# Altium PCB Board.PcbDoc (part 2 of 4)
Units mm, origin at the board's own origin, x right, y up, seen from the top; angles counter-clockwise.
Board outline 88 x 92.5 mm, 2 copper layers (Top Layer, Bottom Layer); 85 components, 67 nets, 346 pads, 106 vias.
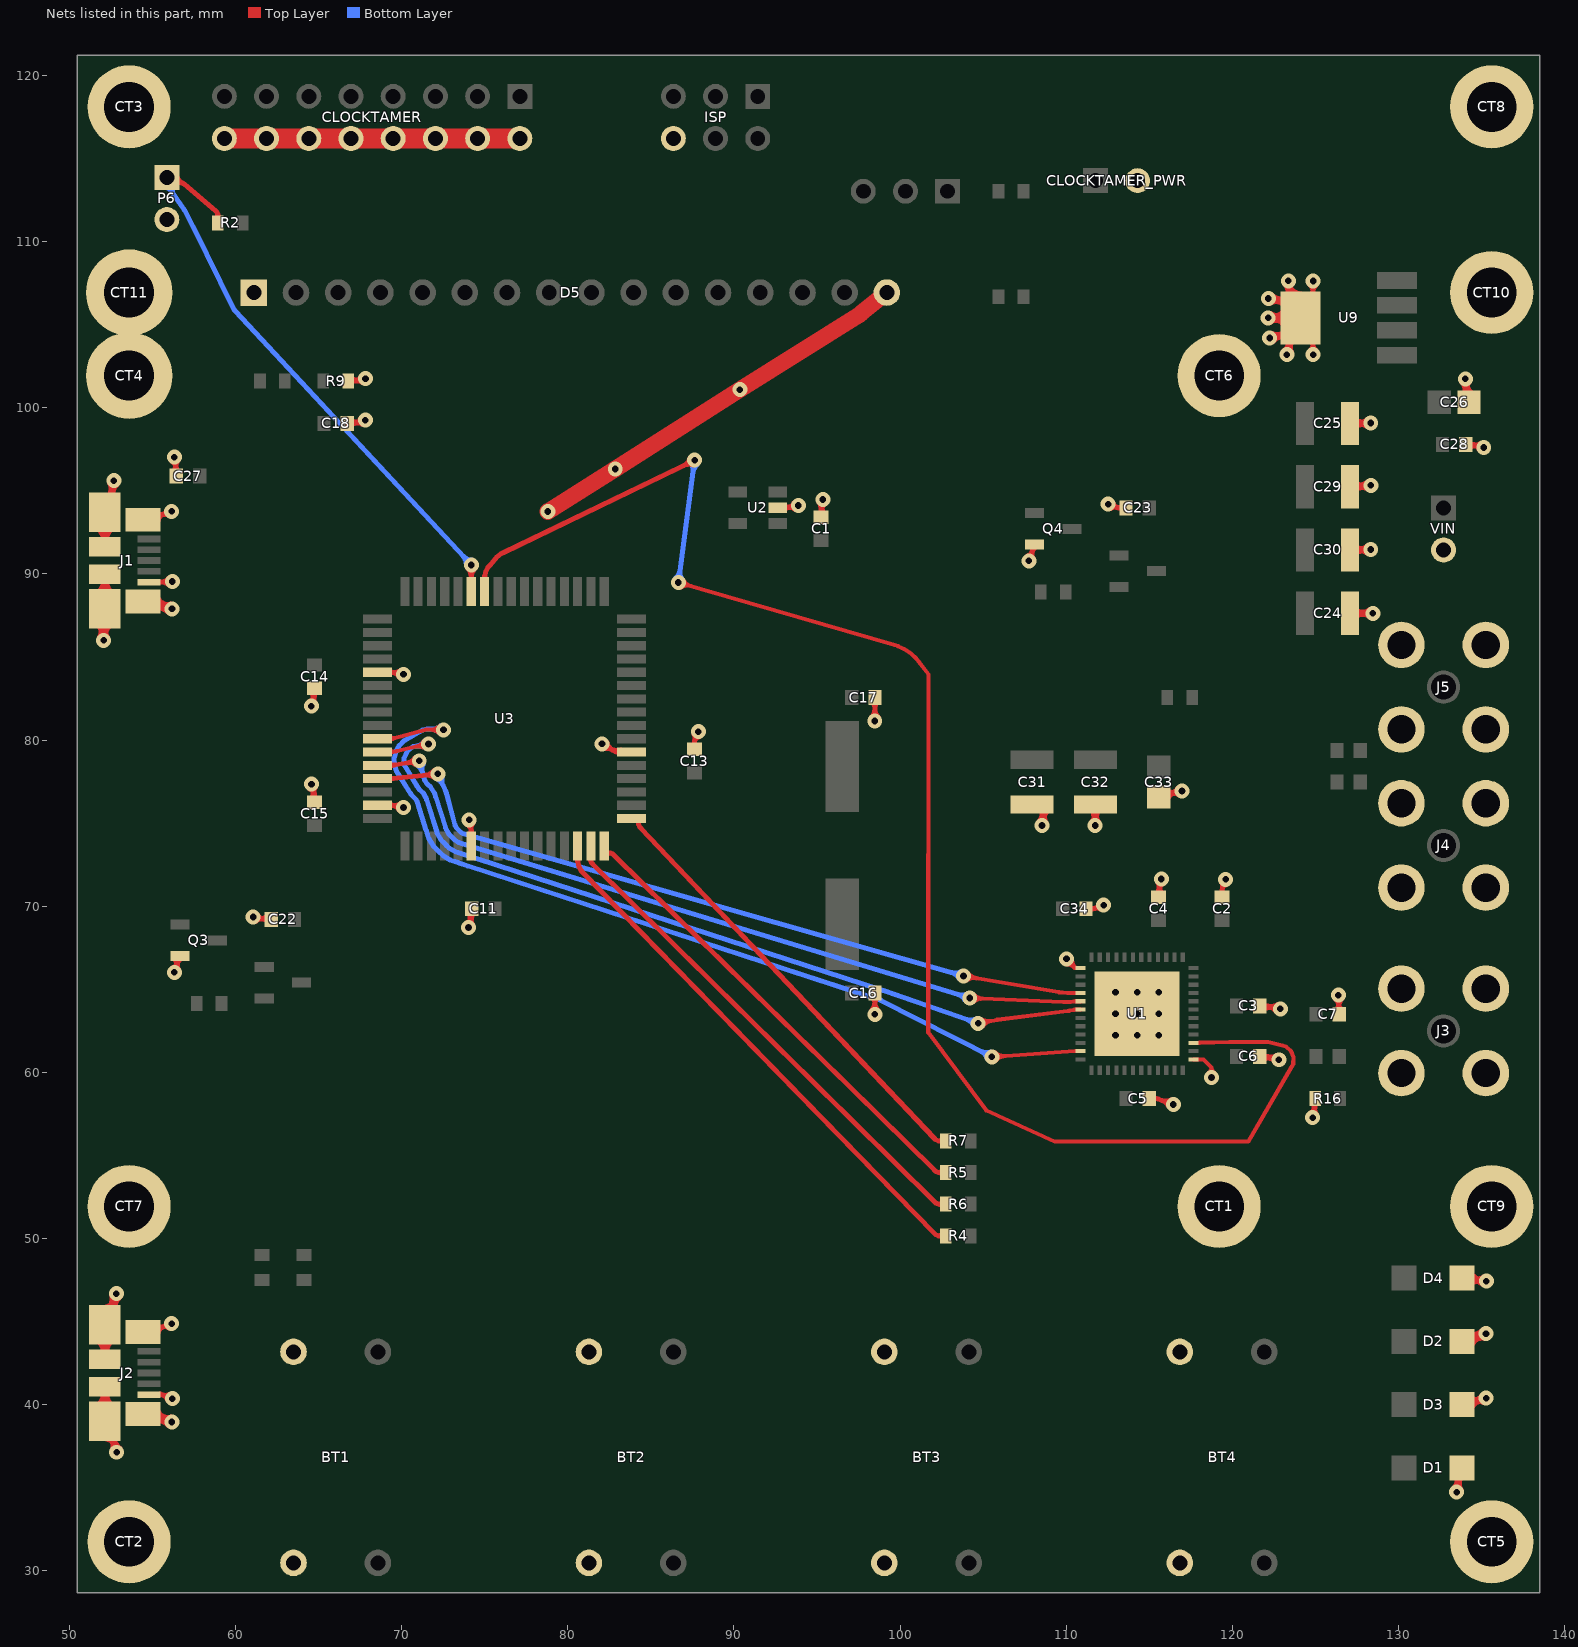
[diagram p2: the nets of this part, all layers, seen from the top]

## Via types
v1: diameter 0.9, hole 0.4, Top Layer to Bottom Layer, tented both sides, 97 vias
v2: diameter 0.8, hole 0.4, Top Layer to Bottom Layer, tented both sides, 9 vias

## Nets (pads, with @x,y where several pads share a name; then routed paths per layer and width w, separated by ;. In a path a pad name is that pad's centre, name@x,y a point inside that pad or via, vN(x,y) a via of type N, cw(c..) or ccw(c..) an arc to the next point about the centre after c; other vN are vias at no path point) (continued)
GND: BT1.3 BT1.4 BT2.3 BT2.4 BT3.3 BT3.4 BT4.3 BT4.4 C1.1 C2.1 C3.1 C4.1 C5.1 C6.1 C7.1 C11.1 C13.2 C14.1 C15.1 C16.1 C17.1 C18.2 C22.2 C23.2 C24.1 C25.1 C26.1 C27.2 C28.2 C29.1 C30.1 C31.1 C32.1 C33.1 C34.2 CLOCKTAMER.2 CLOCKTAMER.4 CLOCKTAMER.6 CLOCKTAMER.8 CLOCKTAMER.10 CLOCKTAMER.12 CLOCKTAMER.14 CLOCKTAMER.16 CLOCKTAMER_PWR.2 CT1.1 CT2.1 CT3.1 CT4.1 CT5.1 CT6.1 CT7.1 CT8.1 CT9.1 CT10.1 CT11.1 D1.2 D2.2 D3.2 D4.2 D5.1 D5.16 ISP.6 J1.5 J1.DP0 J1.DP1 J1.DP2 J1.DP3 J1.DP4 J1.DP5 J2.5 J2.DP0 J2.DP1 J2.DP2 J2.DP3 J2.DP4 J2.DP5 J3.2 J3.3 J3.4 J3.5 J4.2 J4.3 J4.4 J4.5 J5.2 J5.3 J5.4 J5.5 P6.2 Q3.2 Q4.2 R9.1 R16.2 U1.1 U1.25 U1.49 U2.2 U3.6 U3.22 U3.53 U3.63 U9.5 VIN.2 | length 445.1
  Top Layer w0.25: v1(110.02,66.83) 110.477,66.321 ; v1@110.036,66.505 cw(c110.063,65.949) 110.477,66.321 ; v1@110.325,66.716 ccw(c110.576,66.623) 110.429,66.398 ; v1@110.341,66.78 ccw(c110.891,66.694) 110.477,66.321 ; v1@110.345,66.817 ccw(c110.97,66.793) 110.57,66.312 ; 110.378,66.432 ccw(c110.72,66.739) U1.1@110.695,66.28 ; U1.1@110.87,66.28 110.543,66.28 110.495,66.302 110.477,66.321 ; U1.25@117.67,60.78 118.268,60.78 118.745,60.303 ; v1@118.563,59.959 ccw(c118.33,60.303) 118.745,60.303 ; v1(118.745,59.69) 118.745,60.303 ; v1@118.927,59.959 cw(c119.16,60.303) 118.745,60.303 ; v1@110.087,66.512 cw(c110.152,66.207) 110.322,66.468 ccw(c110.152,66.207) v1@110.087,66.512
  Top Layer w0.3: J1.DP2@51.35,90 51.788,89.968 J1.DP2@52.15,89.968 J1.DP1@52.15,87.892 52.07,86.855 v1(52.07,86) ; J1.DP3@51.35,91.78 51.788,91.642 J1.DP3@52.15,91.642 J1.DP4@52.15,93.718 52.65,94.755 52.65,94.905 52.651,94.931 ; J1.DP1@51.604,87.07 cw(c50.604,85.998) v1(52.07,86) cw(c53.27,85.998) J1.DP1@52.598,86.992 ; J2.DP1@51.605,39.821 ccw(c50.44,41.072) J2.DP2@52.15,41.073 ccw(c53.86,41.072) J2.DP1@52.695,39.821 ; J2.DP4@51.605,43.999 cw(c50.44,42.748) J2.DP3@52.15,42.747 cw(c53.86,42.748) J2.DP4@52.695,43.999 ; J1.DP1@51.605,88.716 ccw(c50.44,89.967) J1.DP2@52.15,89.968 ccw(c53.86,89.967) J1.DP1@52.695,88.716 ; J1.DP4@51.605,92.894 cw(c50.44,91.643) J1.DP3@52.15,91.642 cw(c53.86,91.643) J1.DP4@52.695,92.894 ; J1.DP1@51.809,87.289 cw(c51.248,86.689) 52.07,86.689 ; J2.DP1@51.809,39.601 ccw(c51.081,40.383) 52.15,40.383 ccw(c53.219,40.383) J2.DP1@52.491,39.601 ; J2.DP4@51.809,44.219 cw(c51.081,43.437) 52.15,43.437 cw(c53.219,43.437) J2.DP4@52.491,44.219 ; v1@51.81,86.15 ccw(c51.184,86.511) 51.882,86.698 ; J1.DP1@51.809,88.496 ccw(c51.081,89.278) 52.15,89.278 ccw(c53.219,89.278) J1.DP1@52.491,88.496 ; J1.DP4@51.809,93.114 cw(c51.081,92.332) 52.15,92.332 cw(c53.219,92.332) J1.DP4@52.491,93.114 ; J2.DP2@51.841,40.763 cw(c51.094,40.016) 52.15,40.016 cw(c53.206,40.016) J2.DP2@52.459,40.763 ; J2.DP3@51.841,43.057 ccw(c51.094,43.804) 52.15,43.804 ccw(c53.206,43.804) J2.DP3@52.459,43.057 ; J1.DP2@51.841,89.658 cw(c51.094,88.911) 52.15,88.911 cw(c53.206,88.911) J1.DP2@52.459,89.658 ; J1.DP3@51.841,91.952 ccw(c51.094,92.699) 52.15,92.699 ccw(c53.206,92.699) J1.DP3@52.459,91.952 ; v1@51.858,86.212 ccw(c51.346,86.724) 52.07,86.724 ccw(c52.794,86.724) v1@52.282,86.212 ; 51.882,86.701 ccw(c52.583,86.888) v1@52.22,86.26 ; v1@51.951,86.276 ccw(c51.758,86.726) 52.231,86.599 ccw(c52.706,86.472) v1@52.311,86.179 ; J2.DP4@51.97,45.526 ccw(c51.508,46.722) v1@52.732,46.342 ; J2.DP4@52.06,45.238 ccw(c51.563,46.222) 52.652,46.056 ; J2.DP4@52.064,45.241 ccw(c51.619,46.18) 52.647,46.024 ; 52.07,86.563 cw(c52.888,86.563) J1.DP1@52.43,87.241 ; J2.DP1@52.072,38.576 cw(c51.707,37.71) J2.DP1@52.633,37.869 ; J2.DP1@52.078,38.573 cw(c51.764,37.756) J2.DP1@52.627,37.904 ; J2.DP4@52.085,45.857 ccw(c52.023,46.612) v1@52.746,46.387 ; J2.DP1@52.139,37.96 cw(c52.13,37.338) 52.716,37.546 cw(c53.528,37.833) J2.DP1@52.814,38.313 ; J2.DP2@52.15,41.073 J2.DP1@52.15,38.997 52.65,37.96 52.65,37.771 52.663,37.696 ; J2.DP3@52.15,42.747 J2.DP4@52.15,44.823 52.65,45.86 52.65,46.01 52.65,46.044 52.66,46.111 ; J1.DP4@52.219,93.882 ccw(c51.271,94.882) J1.DP4@52.648,94.845 ; J2.DP4@52.412,45.834 ccw(c51.527,46.393) v1@52.547,46.624 ; v1@52.475,95.4 cw(c52.031,94.967) 52.651,94.931 ; 52.558,37.776 cw(c52.152,37.497) v1@52.592,37.275 ; 52.558,46.089 ccw(c52.169,46.334) v1@52.575,46.549 ; v1@52.595,46.516 cw(c52.217,46.248) 52.66,46.111 ; v1@52.612,37.309 ccw(c52.255,37.553) 52.663,37.697 ; 52.629,46.201 cw(c53.004,45.964) 52.906,46.397 ccw(c52.995,46.005) 52.655,46.22 ; v1@52.632,37.335 ccw(c52.372,37.557) 52.713,37.584 ; J2.DP1@52.671,38.123 ccw(c53.774,38.209) v1@53.055,37.368 ; v1(52.69,95.61) 52.651,94.931 ; 52.693,37.579 ccw(c52.978,37.775) v1@52.915,37.435 ; J2.DP4@52.722,45.772 cw(c53.725,45.732) 53.044,46.47 ccw(c53.688,45.773) J2.DP4@52.74,45.81 ; 52.737,46.167 ccw(c52.293,46.185) 52.62,46.486 cw(c52.253,46.147) 52.752,46.127 ; v1@52.746,46.387 ccw(c53.876,46.037) J2.DP4@52.846,45.454 ; v1@52.765,46.448 ccw(c54.037,46.053) J2.DP4@52.858,45.432 ; v1(52.84,46.69) 52.67,46.143 ; v1(52.86,37.14) 52.676,37.66 ; v1@52.879,95.377 ccw(c53.271,94.895) 52.651,94.931 ; v1@52.943,46.408 ccw(c53.102,45.974) 52.66,46.111 ; v1@52.946,37.427 cw(c53.069,37.84) 52.663,37.697 ; J2.DP0@54.45,39.448 55.35,39.161 55.536,39.161 55.607,39.149 55.641,39.138 ; J2.DP5@54.45,44.372 55.35,44.66 55.54,44.66 55.62,44.674 55.658,44.689 ; J1.DP0@54.45,88.343 55.35,88.056 55.527,88.056 55.581,88.049 55.607,88.043 ; J1.DP5@54.45,93.267 55.35,93.555 55.539,93.555 55.617,93.569 ; J2.5@54.81,40.61 55.5,40.61 55.539,40.61 55.615,40.596 ; J1.5@54.81,89.505 55.5,89.505 55.521,89.506 v1(56.21,89.54) ; J1.DP0@55.011,88.485 ccw(c55.821,88.973) 55.708,88.034 ; J1.DP0@55.01,88.486 ccw(c55.852,88.997) 55.618,88.04 ; J2.DP0@55.026,39.559 ccw(c55.655,39.838) 55.546,39.159 ; J2.DP0@55.031,39.548 ccw(c55.601,39.769) 55.504,39.166 ; J2.DP5@55.032,44.276 cw(c55.592,44.058) J2.DP5@55.486,44.65 ; J1.DP5@55.031,93.169 cw(c55.603,92.941) J1.DP5@55.496,93.547 ; J2.DP0@55.034,38.935 cw(c55.623,37.766) v1@56.033,39.009 ; J1.DP5@55.036,93.183 cw(c55.544,93.012) J1.DP5@55.451,93.539 ; J1.DP0@55.073,87.851 cw(c55.627,86.94) v1@55.88,87.976 ; J1.DP0@55.105,87.872 cw(c55.584,87.189) 55.783,88 cw(c55.925,88.582) J1.DP0@55.338,88.46 ; J2.DP0@55.159,39.02 cw(c55.509,38.629) 55.673,39.127 cw(c55.823,39.585) 55.345,39.523 ccw(c55.821,39.584) 55.671,39.128 ccw(c55.508,38.634) J2.DP0@55.16,39.021 ; J1.DP5@55.17,93.681 ccw(c55.493,94.027) 55.654,93.582 ; J2.DP0@55.173,39.033 cw(c55.494,38.699) 55.638,39.139 cw(c55.771,39.543) J2.DP0@55.347,39.503 ; J2.DP5@55.176,44.78 ccw(c55.487,45.105) 55.645,44.684 ccw(c55.81,44.246) J2.DP5@55.346,44.303 ; J2.DP0@55.182,39.041 cw(c55.469,38.754) J2.DP0@55.469,39.161 ; J1.DP0@55.182,87.936 cw(c55.469,87.649) J1.DP0@55.469,88.056 ; J2.DP5@55.185,44.772 ccw(c55.455,45.042) J2.DP5@55.455,44.66 ; J1.DP5@55.185,93.667 ccw(c55.455,93.937) J1.DP5@55.455,93.555 ; J1.DP5@55.186,93.665 ccw(c55.477,93.954) 55.617,93.569 ; J2.DP5@55.192,44.764 ccw(c55.472,45.032) 55.608,44.67 ccw(c55.75,44.293) J2.DP5@55.348,44.326 ; J1.DP0@55.202,87.987 cw(c55.226,86.892) 55.983,87.683 ccw(c55.287,86.956) J1.DP0@55.265,87.962 ; J1.DP0@55.267,88.641 ccw(c56.728,89.529) v1@56.322,87.868 ; J2.DP0@55.288,39.707 ccw(c56.599,40.367) v1@56.139,38.973 ; J2.5@55.336,40.575 cw(c55.477,40.438) 55.547,40.622 ; J1.DP5@55.346,93.197 cw(c55.815,93.137) 55.654,93.582 ; J1.DP5@55.348,93.219 cw(c55.757,93.183) 55.617,93.569 ; J2.DP0@55.362,39.047 cw(c55.313,38.187) v1@55.956,38.76 ; 55.526,88.304 cw(c55.158,87.632) v1@55.9,87.825 ; 55.546,39.363 ccw(c55.964,40) v1@56.119,39.254 ; 55.556,39.036 ccw(c55.589,39.622) v1@55.98,39.184 ; 55.571,88.116 ccw(c55.771,88.48) v1@56.014,88.143 ; 55.591,39.333 cw(c55.214,38.759) v1@55.886,38.899 ; 55.646,88.238 ccw(c55.937,88.768) v1@56.106,88.188 ; 55.663,87.971 ccw(c55.654,88.413) 55.973,88.107 cw(c55.718,88.352) 55.725,87.998 ; 55.732,88.027 cw(c55.562,87.717) v1@55.902,87.816 ; v1@55.881,44.959 cw(c55.472,45.071) 55.621,44.675 cw(c55.769,44.281) v1@56.003,44.631 ; v1@55.882,93.853 cw(c55.47,93.971) 55.616,93.568 cw(c55.763,93.163) v1@56.003,93.521 ; v1@55.896,38.863 ccw(c55.463,38.714) 55.606,39.149 ccw(c55.749,39.587) v1@56.01,39.207 ; v1@55.914,87.782 ccw(c55.5,87.605) 55.607,88.043 ; v1@55.926,40.274 ccw(c55.428,40.105) 55.615,40.596 ; v1@55.981,89.733 cw(c55.489,90.147) 55.521,89.506 cw(c55.553,88.864) v1@56.001,89.325 ; v1@55.988,93.531 ccw(c55.775,93.251) 55.654,93.582 ; v1@55.989,93.531 ccw(c55.774,93.247) 55.653,93.582 ccw(c55.532,93.914) 55.877,93.836 cw(c55.533,93.914) 55.654,93.582 ; v1@56,88.132 cw(c55.714,88.48) 55.607,88.043 ; v1@56.062,40.631 cw(c55.801,41.088) 55.615,40.596 ; v1(56.17,44.88) 55.658,44.689 ; v1(56.17,93.77) 55.654,93.582 ; v1(56.18,38.96) 55.641,39.138 ; v1@56.185,96.768 cw(c55.933,96.314) 56.443,96.407 ; v1(56.19,87.9) 55.607,88.043 ; v1(56.21,40.37) 55.651,40.582 ; v1@56.239,66.306 ccw(c56.104,66.727) 56.523,66.584 ccw(c56.94,66.441) v1@56.577,66.19 ; C27.2@56.244,96.077 ccw(c55.529,96.572) v1@56.385,96.728 ; Q3.2@56.289,66.88 cw(c55.974,66.501) v1@56.44,66.342 ; v1(56.33,66.02) 56.511,66.55 ; v1(56.33,97.03) 56.443,96.407 ; C27.2@56.332,96.155 ccw(c56.225,96.353) 56.45,96.353 ; C27.2@56.45,95.885 56.45,96.353 ; 56.452,66.525 ccw(c56.875,66.496) v1@56.556,66.217 ; 56.453,96.357 ccw(c56.784,96.418) C27.2@56.592,96.141 ; Q3.2@56.525,66.929 cw(c56.19,66.765) 56.543,66.644 ; 56.535,66.635 cw(c56.758,66.635) Q3.2@56.699,66.85 ; 56.548,66.659 cw(c56.88,66.545) Q3.2@56.726,66.86 ; v1@56.559,96.836 ccw(c56.954,96.5) 56.443,96.407 ; v1@56.568,66.203 cw(c56.86,66.429) 56.511,66.549 ; v1@56.568,66.203 cw(c56.863,66.429) 56.511,66.55 ; C27.2@56.568,96.155 cw(c56.675,96.353) 56.45,96.353 ; Q3.2@56.66,66.995 56.535,66.845 56.535,66.658 56.523,66.585 56.511,66.55 ; v1(61.07,69.35) 61.673,69.224 ; v1@61.263,69.121 cw(c61.575,68.752) 61.673,69.224 ; v1@61.339,69.483 ccw(c61.772,69.697) 61.673,69.224 ; v1@61.385,69.284 ccw(c61.528,69.97) C22.2@61.997,69.451 ; C22.2@61.946,69.094 ccw(c61.742,68.982) 61.742,69.215 ; C22.2@61.946,69.336 cw(c61.742,69.448) 61.742,69.215 ; C22.2@62.165,69.215 61.742,69.215 ; v1@64.472,82.324 ccw(c64.323,82.757) 64.759,82.614 ccw(c65.195,82.471) v1@64.817,82.21 ; v1@64.474,77.069 cw(c64.305,76.624) 64.761,76.763 cw(c65.219,76.904) v1@64.826,77.178 ; C15.1@64.528,76.425 ccw(c63.979,76.88) v1@64.66,77.089 ; C14.1@64.527,82.961 cw(c63.981,82.512) v1@64.653,82.291 ; v1(64.57,82.04) 64.748,82.579 ; v1(64.58,77.35) 64.75,76.797 ; C15.1@64.645,76.481 ccw(c64.519,76.699) 64.77,76.699 ; 64.67,82.594 ccw(c65.16,82.567) v1@64.794,82.24 ; 64.671,76.799 cw(c65.154,76.817) v1@64.8,77.146 ; C15.1@64.77,76.265 64.77,76.699 ; C14.1@64.77,83.12 64.77,82.72 64.77,82.685 64.759,82.614 64.748,82.579 ; v1@64.817,77.166 ccw(c65.139,76.917) 64.75,76.797 ; v1@64.818,77.167 ccw(c65.145,76.916) 64.751,76.796 ccw(c64.36,76.676) 64.487,77.065 cw(c64.361,76.678) 64.75,76.797 ; C15.1@64.895,76.481 cw(c65.021,76.699) 64.77,76.699 ; C18.2@66.74,99.06 67.174,99.06 ; R9.1@66.79,101.6 67.166,101.6 ; C18.2@66.9,99.302 ccw(c67.352,99.842) v1@67.561,99.169 ; R9.1@66.941,101.831 ccw(c67.339,102.175) v1@67.46,101.663 ; R9.1@66.956,101.488 cw(c67.166,101.347) 67.166,101.6 ; R9.1@66.956,101.712 ccw(c67.166,101.853) 67.166,101.6 ; C18.2@66.956,98.935 cw(c67.174,98.809) 67.174,99.06 ; C18.2@66.956,99.185 ccw(c67.174,99.311) 67.174,99.06 ; 67.269,99.158 cw(c67.288,98.674) v1@67.616,99.03 ; 67.341,101.667 cw(c67.329,101.279) v1@67.611,101.545 ; v1@67.538,99.353 cw(c67.104,99.512) 67.241,99.07 cw(c67.378,98.629) v1@67.646,99.006 ; v1@67.556,101.871 cw(c67.139,102.056) 67.243,101.612 ; v1@67.638,101.519 ccw(c67.347,101.168) 67.243,101.612 ; v1(67.82,99.25) 67.274,99.08 ; v1(67.83,101.75) 67.243,101.612 ; U3.63@68.55,76.08 69.439,76.08 ; U3.53@68.55,84.08 69.437,84.08 ; U3.63@69.218,75.975 cw(c69.5,75.544) 69.605,76.048 ; U3.53@69.221,83.977 cw(c69.497,83.582) 69.582,84.056 ; U3.63@69.241,75.994 cw(c69.439,75.808) 69.439,76.08 ; U3.63@69.241,76.166 ccw(c69.439,76.352) 69.439,76.08 ; U3.53@69.241,83.995 cw(c69.437,83.813) 69.437,84.08 ; U3.53@69.241,84.165 ccw(c69.437,84.347) 69.437,84.08 ; v1@69.857,75.796 ccw(c69.367,75.527) 69.482,76.074 ; v1@69.862,83.807 ccw(c69.373,83.516) 69.473,84.076 ; v1@69.931,84.193 cw(c69.574,84.636) 69.473,84.076 ; v1@69.937,76.178 cw(c69.597,76.622) 69.482,76.074 ; v1(70.12,75.94) 69.481,76.074 ; v1(70.12,83.96) 69.473,84.076 ; v1@73.921,74.94 cw(c73.641,74.45) 74.195,74.558 ; v1@73.927,69.002 ccw(c73.76,69.456) 74.22,69.306 ; C11.1@74.013,69.677 cw(c73.179,69.203) v1@74.091,68.908 ; v1(74.03,68.72) 74.21,69.277 74.22,69.307 ; v1(74.07,75.2) 74.195,74.557 ; U3.6@74.096,74.3 ccw(c73.683,74.578) 74.172,74.673 ; C11.1@74.106,69.583 cw(c73.983,69.369) 74.23,69.369 ; 74.112,69.318 ccw(c74.661,69.289) v1@74.253,68.921 ; U3.6@74.115,74.321 ccw(c73.93,74.518) 74.2,74.518 ; U3.6@74.2,73.63 74.2,74.518 ; C11.1@74.23,69.85 74.23,69.369 ; v1@74.279,68.887 cw(c74.68,69.157) 74.22,69.306 ; U3.6@74.285,74.321 cw(c74.47,74.518) 74.2,74.518 ; v1@74.306,75.014 ccw(c74.748,74.665) 74.195,74.558 ; C11.1@74.354,69.583 ccw(c74.477,69.369) 74.23,69.369 ; v1(82.067,79.772) 82.835,79.318 82.867,79.3 82.938,79.28 U3.22@83.85,79.28 ; v1@82.141,79.481 cw(c82.322,78.78) 82.69,79.404 cw(c83.058,80.027) v1@82.357,79.847 ; 82.53,79.499 ccw(c82.992,80.282) U3.22@83.219,79.401 ; U3.22@83.162,79.192 ccw(c82.948,78.978) 82.948,79.28 ccw(c82.948,79.582) U3.22@83.162,79.368 ; C13.2@87.501,79.654 ccw(c87.364,79.882) 87.63,79.882 ; v1@87.607,80.348 cw(c87.25,80.119) 87.645,79.964 cw(c88.038,79.81) v1@87.934,80.219 ; C13.2@87.63,79.44 87.63,79.882 ; C13.2@87.759,79.654 cw(c87.896,79.882) 87.63,79.882 ; v1(87.86,80.51) 87.661,80.005 ; U2.2@92.64,93.98 93.207,93.98 ; U2.2@92.96,94.127 ccw(c93.329,94.696) v1@93.471,94.033 ; U2.2@93.007,93.878 cw(c93.207,93.733) 93.207,93.98 ; U2.2@93.007,94.082 ccw(c93.207,94.227) 93.207,93.98 ; v1@93.614,94.258 cw(c93.148,94.5) 93.258,93.987 ; v1@93.693,93.885 ccw(c93.367,93.474) 93.258,93.987 ; v1(93.88,94.12) 93.258,93.987 ; v1@95.125,94.294 cw(c94.64,93.91) 95.25,93.81 ; C1.1@95.25,93.41 95.25,93.81 ; v1@95.305,94.146 ccw(c95.955,94.04) C1.1@95.48,93.583 ; v1(95.36,94.48) 95.25,93.81 ; v1@95.523,94.228 ccw(c95.86,93.71) 95.25,93.81 ; v1@98.27,81.364 ccw(c97.763,81.882) 98.488,81.874 ccw(c99.212,81.867) v1@98.694,81.36 ; v1@98.274,63.708 ccw(c97.765,64.224) 98.489,64.219 ccw(c99.214,64.214) v1@98.698,63.705 ; C16.1@98.312,64.544 cw(c97.876,64.114) 98.489,64.11 ; C17.1@98.311,82.325 cw(c97.87,81.893) 98.488,81.886 ; C17.1@98.378,82.276 cw(c98.288,82.096) 98.49,82.096 ; C16.1@98.379,64.496 cw(c98.291,64.318) 98.49,64.318 ; v1(98.48,81.15) 98.49,82.096 ; v1(98.485,63.495) 98.49,64.317 ; 98.489,64.123 cw(c99.084,64.119) C16.1@98.666,64.542 ; 98.488,81.907 cw(c99.077,81.901) C17.1@98.665,82.321 ; C16.1@98.49,64.77 98.49,64.317 ; C17.1@98.49,82.55 98.49,82.096 ; C16.1@98.601,64.496 ccw(c98.689,64.318) 98.49,64.318 ; C17.1@98.602,82.276 ccw(c98.692,82.096) 98.49,82.096 ; v1@107.671,91.079 ccw(c107.558,91.488) 107.955,91.339 ; v1(107.75,90.79) 107.942,91.302 ; 107.942,91.266 cw(c108.509,91.164) Q4.2@108.181,91.637 ; C31.1@107.95,76.12 108.543,75.72 v1(108.543,74.86) ; 107.97,91.398 cw(c108.196,91.398) Q4.2@108.135,91.616 ; v1@107.99,90.97 cw(c108.268,91.18) 107.941,91.302 ; v1@107.989,90.971 cw(c108.266,91.18) 107.941,91.302 cw(c107.615,91.424) 107.688,91.083 ccw(c107.615,91.425) 107.941,91.302 ; v1@108,90.957 cw(c108.351,91.191) 107.955,91.339 ; Q4.2@108.095,91.76 107.97,91.61 107.97,91.42 107.956,91.34 ; v1@108.331,75.072 ccw(c107.819,75.584) 108.543,75.584 ccw(c109.267,75.584) v1@108.755,75.072 ; v1@108.406,75.127 ccw(c108.125,75.677) 108.721,75.517 ccw(c109.328,75.355) v1@108.797,75.02 ; C31.1@108.417,75.837 cw(c108.114,75.534) 108.543,75.534 ; v1@108.543,74.85 cw(c109.868,74.85) C31.1@108.971,75.826 ; 108.543,75.534 cw(c109.239,75.534) C31.1@108.768,76.046 ; C34.2@111.19,69.85 111.63,69.85 ; C34.2@111.405,69.722 cw(c111.63,69.587) 111.63,69.85 ; C34.2@111.405,69.978 ccw(c111.63,70.113) 111.63,69.85 ; C32.1@111.477,75.837 cw(c110.843,75.203) v1@111.74,75.203 ; v1@111.528,75.072 ccw(c111.016,75.584) 111.74,75.584 ccw(c112.464,75.584) v1@111.952,75.072 ; v1@111.537,75.081 ccw(c111.25,75.393) 111.66,75.503 ; v1@111.59,75.12 ccw(c111.337,75.559) 111.826,75.428 ; 111.694,75.376 ccw(c112.101,75.485) v1@111.89,75.12 ; v1(111.74,74.86) 111.74,75.72 C32.1@111.76,76.12 ; v1@111.74,75.106 cw(c112.774,75.106) C32.1@112.043,75.837 ; 111.85,75.516 ccw(c112.319,75.391) v1@111.961,75.063 ; v1@111.971,70.149 cw(c111.562,70.261) 111.711,69.865 cw(c111.859,69.471) v1@112.093,69.821 ; v1@112.079,69.831 ccw(c111.87,69.556) 111.749,69.879 ccw(c111.626,70.205) 111.967,70.132 cw(c111.625,70.205) 111.748,69.879 ; v1@112.08,69.83 ccw(c111.87,69.552) 111.748,69.879 ; v1(112.26,70.07) 111.748,69.878 ; v1(112.53,94.2) 113.042,94.008 ; v1@112.697,93.95 cw(c112.931,93.599) 113.079,93.995 cw(c113.228,94.392) v1@112.819,94.279 ; v1@112.71,93.96 cw(c112.92,93.682) 113.042,94.009 ; v1@112.711,93.961 cw(c112.92,93.684) 113.042,94.009 cw(c113.164,94.335) 112.823,94.262 ccw(c113.165,94.335) 113.042,94.009 ; C23.2@113.385,93.852 ccw(c113.16,93.718) 113.16,93.98 ; C23.2@113.385,94.108 cw(c113.16,94.242) 113.16,93.98 ; C23.2@113.6,93.98 113.16,93.98 ; C5.1@115,58.42 115.439,58.42 ; C5.1@115.215,58.292 cw(c115.439,58.159) 115.439,58.42 ; C5.1@115.215,58.548 ccw(c115.439,58.681) 115.439,58.42 ; C4.1@115.447,70.768 ccw(c115.329,70.978) 115.57,70.978 ; v1@115.491,71.458 cw(c115.098,71.158) 115.578,71.036 cw(c116.061,70.913) v1@115.854,71.367 ; v1@115.521,71.425 cw(c115.199,71.093) 115.661,71.1 ; C4.1@115.57,70.55 115.57,70.978 ; C33.1@115.57,76.57 116.12,76.82 116.29,76.82 ; v1@115.657,71.352 ccw(c116.346,71.178) C4.1@115.809,70.714 ; C4.1@115.693,70.768 cw(c115.811,70.978) 115.57,70.978 ; v1(115.73,71.64) 115.584,71.06 ; C33.1@115.776,76.428 cw(c116.59,75.864) 116.413,76.839 ; v1@115.845,71.363 ccw(c116.014,70.953) 115.584,71.063 ccw(c115.159,71.171) 115.498,71.45 cw(c115.151,71.169) 115.584,71.06 ; v1@115.845,71.363 ccw(c116.016,70.951) 115.584,71.06 ; C33.1@115.96,76.957 ccw(c116.29,77.285) 116.29,76.82 ; C33.1@116.092,76.398 cw(c116.776,76.174) v1@116.647,76.881 ; v1@116.181,57.941 ccw(c115.525,57.633) 115.771,58.314 ccw(c116.018,58.995) v1@116.325,58.34 ; 116.373,76.752 cw(c116.541,76.398) v1@116.784,76.705 ; v1(116.453,58.068) 115.553,58.393 115.516,58.407 115.439,58.42 ; 116.464,76.795 ccw(c116.279,77.187) v1@116.688,77.041 ; v1@116.707,77.084 cw(c116.259,77.33) 116.351,76.827 ; v1@116.775,76.712 ccw(c116.442,76.325) 116.351,76.827 ; v1(116.97,76.94) 116.351,76.827 ; C2.1@119.252,70.765 ccw(c119.118,70.99) 119.38,70.99 ; v1@119.35,71.453 cw(c118.999,71.219) 119.395,71.071 cw(c119.792,70.922) v1@119.679,71.331 ; v1@119.361,71.439 cw(c119.084,71.23) 119.409,71.108 cw(c119.735,70.986) 119.662,71.327 ccw(c119.735,70.985) 119.409,71.108 ; v1@119.36,71.44 cw(c119.082,71.23) 119.409,71.108 ; C2.1@119.38,70.55 119.38,70.99 ; C2.1@119.508,70.765 cw(c119.642,70.99) 119.38,70.99 ; v1(119.6,71.62) 119.408,71.108 ; C6.1@121.65,60.96 122.082,60.96 ; C3.1@121.65,64 122.074,64 ; C3.1@121.79,63.743 cw(c122.362,62.892) v1@122.583,63.893 ; C6.1@121.798,60.708 cw(c122.299,60.025) v1@122.533,60.839 ; C6.1@121.867,60.836 cw(c122.082,60.712) 122.082,60.96 ; C6.1@121.867,61.084 ccw(c122.082,61.208) 122.082,60.96 ; C3.1@121.869,63.879 cw(c122.074,63.765) 122.074,64 ; C3.1@121.869,64.121 ccw(c122.074,64.235) 122.074,64 ; v1(122.167,106.579) 122.888,106.56 ; v1(122.251,104.198) U9.5@122.9,104.26 ; 122.256,60.844 ccw(c122.264,61.32) v1@122.595,60.978 ; v1@122.282,104.201 ccw(c122.041,106.708) U9.5@123.984,105.105 ; v1@122.324,105.163 cw(c122.644,104.689) 122.792,105.242 cw(c122.94,105.794) v1@122.426,105.543 ; v1@122.323,105.661 ccw(c122.645,106.141) 122.794,105.583 ccw(c122.944,105.025) v1@122.425,105.28 ; v1@122.368,105.2 cw(c122.88,104.688) 122.88,105.412 cw(c122.88,106.136) v1@122.368,105.624 ; v1@122.374,106.362 cw(c122.869,105.843) 122.888,106.56 ; v1@122.375,104.471 ccw(c122.687,105.155) U9.5@122.95,104.45 ; v1@122.385,106.785 ccw(c122.907,107.277) 122.888,106.56 ; v1@122.459,104.414 ccw(c122.846,104.817) 122.9,104.26 ; v1@122.496,104.025 cw(c122.953,103.703) 122.9,104.26 ; v1@122.524,104.073 cw(c123.157,103.784) U9.5@122.914,104.437 ; v1@122.53,60.636 ccw(c122.019,60.402) 122.174,60.942 ; v1@122.637,63.664 ccw(c122.026,63.274) 122.182,63.982 ccw(c122.339,64.689) v1@122.728,64.078 ; v1@122.639,61.013 cw(c122.33,61.483) 122.174,60.942 ; 122.711,105.412 cw(c122.711,104.502) U9.5@123.472,105 ; 122.713,105.412 ccw(c122.713,106.322) U9.5@123.473,105.822 ; v1(122.803,60.762) 122.174,60.942 ; v1(122.89,63.825) 122.147,63.989 122.123,63.995 122.074,64 ; U9.5@123.003,104.27 ccw(c122.831,106.057) U9.5@124.216,104.915 ; v1@123.124,103.449 ccw(c122.864,103.863) 123.35,103.81 ; v1@123.156,107.423 cw(c122.644,106.911) 123.369,106.911 cw(c124.093,106.911) v1@123.581,107.423 ; v1@123.162,103.469 ccw(c122.886,104.096) U9.5@123.524,103.848 ; v1@123.219,107.376 cw(c122.992,106.984) 123.429,107.101 ; U9.5@123.221,104.836 ccw(c122.156,104.14) v1(122.156,105.412) ; U9.5@123.223,105.987 cw(c122.156,106.688) v1(122.156,105.412) ; v1(123.283,103.194) U9.5@123.35,103.81 ; v1@123.288,103.239 cw(c125.738,102.972) U9.5@124.194,104.893 ; U9.5@123.366,103.959 cw(c125.096,103.77) U9.5@124.006,105.127 ; 123.369,107.021 ccw(c124.129,107.021) U9.5@124.111,106.26 ; v1@123.369,107.328 ccw(c124.137,107.328) U9.5@124.118,106.56 ; 123.436,107.077 cw(c123.724,107.154) v1@123.547,107.394 ; v1@123.493,103.408 cw(c123.836,103.757) 123.35,103.81 ; U9.5@123.544,103.9 ccw(c124.256,103.623) v1@123.558,103.315 ; U9.5@124.126,106.86 cw(c124.144,107.635) v1(123.369,107.635) 123.369,106.86 U9.5@124.1,105.41 ; U9.5@124.203,105.119 cw(c122.774,103.606) 124.854,103.665 ; U9.5@124.203,105.701 ccw(c122.777,107.212) 124.854,107.152 ; v1@124.676,103.425 ccw(c124.367,103.796) 124.85,103.81 ; v1@124.676,107.394 cw(c124.369,107.024) 124.85,107.01 ; v1@124.699,57.55 ccw(c124.478,58.005) 124.971,57.891 ; v1@124.72,57.559 ccw(c124.616,57.826) 124.902,57.836 ; R16.2@124.81,58.214 cw(c124.147,57.8) v1@124.909,57.624 ; v1(124.83,57.28) 124.971,57.891 ; v1(124.867,103.194) U9.5@124.85,103.81 ; v1(124.868,107.625) U9.5@124.85,107.01 ; 124.904,57.787 ccw(c125.316,57.801) v1@125.035,57.499 ; R16.2@124.98,58.42 124.98,57.97 124.98,57.95 124.975,57.91 124.971,57.891 ; v1@125.046,103.435 cw(c125.333,103.824) 124.85,103.81 ; v1@125.046,107.383 ccw(c125.331,106.996) 124.85,107.01 ; v1@125.066,57.465 cw(c125.464,57.778) 124.971,57.891 ; v1@126.196,64.413 cw(c125.826,63.935) 126.429,63.979 ; C7.1@126.241,63.713 ccw(c125.706,64.175) v1@126.411,64.227 ; v1@126.267,64.372 cw(c126.189,64.178) 126.394,64.139 ; C7.1@126.317,63.773 ccw(c126.224,63.957) 126.43,63.957 ; v1(126.38,64.65) 126.429,63.979 ; 126.402,64.179 cw(c126.745,64.113) v1@126.548,64.402 ; 126.421,64.082 ccw(c126.921,64.118) C7.1@126.593,63.739 ; C7.1@126.43,63.5 126.43,63.957 ; C7.1@126.543,63.773 cw(c126.636,63.957) 126.43,63.957 ; v1@126.596,64.442 ccw(c127.031,64.023) 126.429,63.979 ; C24.1@127.08,87.63 127.48,87.631 v1(128.453,87.631) ; C30.1@127.08,91.44 127.48,91.47 v1(128.33,91.47) ; C29.1@127.08,95.25 127.48,95.334 v1(128.34,95.334) ; C25.1@127.08,99.06 127.48,99.08 v1(128.33,99.08) ; C24.1@127.363,87.347 cw(c128.049,86.661) v1@128.049,87.631 ; C24.1@127.363,87.913 ccw(c128.042,88.592) v1@128.042,87.631 ; C30.1@127.363,91.157 cw(c128.118,90.402) v1@128.118,91.47 ; C30.1@127.363,91.723 ccw(c127.973,92.333) v1@127.973,91.47 ; C29.1@127.363,94.967 cw(c128.249,94.081) v1@128.249,95.334 ; C29.1@127.363,95.533 ccw(c127.842,96.012) 127.842,95.334 ; C25.1@127.363,98.777 cw(c128.094,98.046) v1@128.094,99.08 ; C25.1@127.363,99.343 ccw(c127.997,99.977) v1@127.997,99.08 ; 127.662,95.177 cw(c127.82,94.588) v1@128.168,95.088 ; 127.676,91.351 cw(c127.804,90.872) v1@128.132,91.245 ; 127.679,98.969 cw(c127.803,98.506) v1@128.127,98.859 ; 127.689,95.184 ccw(c127.523,95.806) v1@128.08,95.484 ; 127.693,99.162 ccw(c127.801,99.565) v1@128.109,99.283 ; 127.696,91.544 ccw(c127.801,91.935) v1@128.105,91.668 ; 127.739,87.548 cw(c127.875,87.038) v1@128.244,87.417 ; 127.74,87.712 ccw(c127.875,88.218) v1@128.242,87.845 ; 127.744,91.37 ccw(c127.605,91.889) v1@128.07,91.62 ; 127.757,98.99 ccw(c127.624,99.488) v1@128.07,99.23 ; 127.809,99.131 cw(c127.697,98.715) v1@128.07,98.93 ; 127.822,91.511 cw(c127.716,91.115) v1@128.07,91.32 ; 127.97,87.61 ccw(c127.875,87.965) v1@128.193,87.781 ; 127.974,87.65 cw(c127.88,87.301) v1@128.193,87.481 ; v1@128.118,91.258 ccw(c127.606,90.746) 127.606,91.47 ccw(c127.606,92.194) v1@128.118,91.682 ; v1@128.118,98.868 ccw(c127.606,98.356) 127.606,99.08 ccw(c127.606,99.804) v1@128.118,99.292 ; v1@128.128,95.122 ccw(c127.616,94.61) 127.616,95.334 ccw(c127.616,96.058) v1@128.128,95.546 ; v1@128.241,87.419 ccw(c127.729,86.907) 127.729,87.631 ccw(c127.729,88.356) v1@128.241,87.844 ; v1@133.306,34.969 ccw(c132.895,35.453) 133.53,35.426 ; D1.2@133.397,35.78 cw(c133.053,35.449) 133.53,35.439 ; v1(133.5,34.74) 133.53,35.426 ; v1@133.713,34.951 cw(c134.164,35.398) 133.53,35.426 ; v1@133.808,101.528 cw(c133.296,101.016) 134.02,101.016 cw(c134.744,101.016) v1@134.232,101.528 ; D1.2@133.83,36.195 133.53,35.595 133.53,35.445 133.53,35.426 ; D3.2@133.83,40.005 134.43,40.305 134.596,40.305 134.628,40.307 134.643,40.31 ; D2.2@133.83,43.815 134.43,44.115 134.609,44.115 134.666,44.122 ; D4.2@133.83,47.625 134.43,47.439 v1(135.29,47.439) cw(c135.29,48.587) D4.2@134.331,47.955 ; C26.1@133.861,100.719 ccw(c133.477,101.103) 134.02,101.103 ; v1@133.917,101.458 cw(c133.778,101.078) 134.169,101.183 ; 134.02,101.198 ccw(c134.794,101.198) C26.1@134.383,100.542 ; C28.2@134.05,97.79 134.482,97.79 ; D3.2@134.07,39.825 cw(c135.16,39.006) v1@134.968,40.356 ; D4.2@134.08,47.79 ccw(c134.733,48.22) 134.733,47.439 ; D2.2@134.089,43.663 cw(c134.968,43.148) 134.711,44.134 ; D2.2@134.09,43.665 cw(c134.927,43.182) 134.802,44.14 ; D2.2@134.094,43.673 cw(c134.882,43.248) 134.767,44.135 ; D3.2@134.1,39.874 cw(c134.823,39.524) 134.71,40.319 ; D2.2@134.133,44.333 ccw(c134.717,45.328) v1@135.008,44.212 ; 134.169,101.183 cw(c134.56,101.288) v1@134.25,101.547 ; D2.2@134.189,44.296 ccw(c134.648,44.913) 134.843,44.169 ccw(c134.988,43.611) D2.2@134.421,43.711 ; D2.2@134.199,44.288 ccw(c134.636,44.85) 134.815,44.161 ccw(c134.95,43.646) D2.2@134.423,43.726 ; C28.2@134.212,97.55 cw(c134.666,97.016) v1@134.862,97.688 ; C26.1@134.25,100.33 134.02,100.88 v1(134.02,101.74) ccw(c135.134,101.74) C26.1@134.542,100.796 ; D3.2@134.254,40.429 ccw(c134.554,40.729) D3.2@134.554,40.305 ; D2.2@134.254,44.239 ccw(c134.554,44.539) D2.2@134.554,44.115 ; D4.2@134.254,47.201 cw(c134.829,46.626) 134.829,47.439 ; C28.2@134.267,97.665 cw(c134.482,97.541) 134.482,97.79 ; C28.2@134.267,97.915 ccw(c134.482,98.039) 134.482,97.79 ; D2.2@134.348,43.512 cw(c135.852,42.63) v1@135.412,44.317 ; D3.2@134.368,39.739 cw(c135.452,39.203) v1(135.28,40.4) ; D2.2@134.376,44.216 ccw(c134.382,45.179) v1@135.059,44.494 ; D3.2@134.4,40.114 cw(c134.794,39.191) v1@135.168,40.122 ; 134.582,97.695 ccw(c134.593,98.172) v1@134.923,97.827 ; 134.608,43.86 ccw(c134.223,44.536) v1@134.979,44.351 ; 134.643,44.055 cw(c134.854,43.683) v1@135.098,44.034 ; 134.714,44.214 cw(c134.711,43.729) 135.056,44.069 ccw(c134.819,43.835) 134.821,44.169 ; 134.718,40.32 ccw(c134.833,39.509) 134.099,39.872 cw(c134.835,39.507) 134.719,40.32 ; 134.739,43.934 cw(c135.033,43.417) v1@135.19,43.991 ; 134.763,40.268 ccw(c134.588,40.678) v1@135.002,40.512 ; 134.824,44.158 ccw(c134.659,44.448) v1@134.981,44.36 ; v1@134.851,97.501 ccw(c134.413,97.33) 134.544,97.781 ccw(c134.676,98.236) v1@134.954,97.853 ; v1@134.943,97.844 cw(c134.69,98.16) 134.576,97.772 ; v1@134.943,97.845 cw(c134.689,98.166) 134.575,97.772 cw(c134.461,97.382) 134.846,97.513 ccw(c134.463,97.384) 134.576,97.772 ; v1@134.991,40.48 cw(c134.509,40.614) 134.705,40.155 cw(c134.902,39.694) v1@135.138,40.136 ; v1@134.996,44.402 cw(c134.54,44.606) 134.666,44.122 ; v1@135.011,47.329 ccw(c134.602,47.168) 134.716,47.593 ccw(c134.829,48.017) v1@135.103,47.673 ; v1@135.025,40.558 cw(c134.567,40.843) 134.643,40.31 ; v1@135.078,47.227 ccw(c134.566,46.715) 134.566,47.439 ccw(c134.566,48.163) v1@135.078,47.651 ; v1@135.08,40.177 ccw(c134.719,39.776) 134.643,40.31 ; v1@135.091,44.04 ccw(c134.792,43.639) 134.666,44.122 ; v1(135.13,97.61) 134.576,97.772 ; v1(135.27,44.28) 134.694,44.13 ; v1(135.28,40.4) 134.643,40.31 ; 52.66,46.111 52.67,46.143 ; 52.663,37.696 52.676,37.66 ; 52.67,46.143 ccw(c52.29,46.26) 52.604,46.505 cw(c52.292,46.261) 52.67,46.144 ; 52.67,46.143 cw(c53.049,46.026) 52.93,46.404 ccw(c53.048,46.026) 52.67,46.144 ; 52.676,37.66 ccw(c53.012,37.779) 52.929,37.432 cw(c53.012,37.779) 52.676,37.66 cw(c52.338,37.541) 52.622,37.323 ccw(c52.34,37.541) 52.676,37.66 ; 55.615,40.596 55.651,40.582 ; 55.617,93.569 55.654,93.582 ; 55.641,39.138 ccw(c55.762,39.505) 55.998,39.198 cw(c55.762,39.508) 55.64,39.138 cw(c55.519,38.77) 55.892,38.877 ccw(c55.52,38.77) 55.641,39.138 ; 55.651,40.582 ccw(c55.809,41) 56.049,40.623 cw(c55.809,41) 55.651,40.582 ; 55.651,40.582 cw(c55.492,40.165) 55.922,40.288 ccw(c55.492,40.165) 55.651,40.582 ; 55.658,44.689 ccw(c55.535,45.015) 55.877,44.943 cw(c55.536,45.014) 55.659,44.689 cw(c55.78,44.366) 55.989,44.641 ccw(c55.78,44.362) 55.658,44.689 ; 56.443,96.407 56.447,96.389 56.45,96.353 ; 56.511,66.549 cw(c56.159,66.669) 56.254,66.31 ccw(c56.159,66.67) 56.511,66.55 ; 61.673,69.224 61.696,69.22 61.742,69.215 ; 64.748,82.58 ccw(c65.117,82.458) 64.808,82.222 cw(c65.115,82.458) 64.747,82.579 ; 64.748,82.58 cw(c64.379,82.701) 64.487,82.328 ccw(c64.38,82.7) 64.747,82.579 ; 64.75,76.797 64.76,76.765 64.77,76.699 ; 67.166,101.6 67.218,101.606 67.243,101.612 ; 67.174,99.06 67.241,99.07 67.274,99.08 ; 67.274,99.08 ccw(c67.156,99.458) 67.534,99.34 cw(c67.156,99.458) 67.274,99.08 cw(c67.391,98.704) 67.635,99.014 ccw(c67.391,98.702) 67.274,99.08 ; 69.437,84.08 69.462,84.078 69.473,84.076 ; 69.439,76.08 69.467,76.077 69.481,76.074 ; 74.195,74.557 74.197,74.545 74.2,74.518 ; 74.21,69.277 ccw(c74.61,69.147) 74.272,68.898 cw(c74.611,69.147) 74.21,69.277 ; 74.21,69.277 cw(c73.81,69.406) 73.939,69.006 ccw(c73.81,69.406) 74.21,69.277 ; 74.22,69.307 74.23,69.369 ; 87.63,79.882 87.646,79.965 87.661,80.005 ; 87.661,80.005 ccw(c87.344,80.13) 87.618,80.332 cw(c87.34,80.129) 87.661,80.004 cw(c87.979,79.879) 87.916,80.215 ccw(c87.979,79.88) 87.661,80.005 ; 93.207,93.98 93.241,93.984 93.258,93.987 ; 107.942,91.302 107.956,91.34 ; 111.63,69.85 111.71,69.864 111.748,69.878 ; 113.042,94.008 113.08,93.994 113.16,93.98 ; 115.57,70.978 115.577,71.033 115.584,71.06 ; 116.29,76.82 116.33,76.824 116.351,76.827 ; 119.38,70.99 119.394,71.07 119.408,71.108 ; 122.082,60.96 122.144,60.951 122.174,60.942 ; v1(122.156,105.412) 123.05,105.412 U9.5@124.1,105.41 ; 122.888,106.56 122.9,106.56 123.05,106.56 U9.5@124.1,105.41 ; U9.5@122.9,104.26 123.05,104.26 U9.5@124.1,105.41 ; U9.5@123.35,103.81 123.35,103.96 U9.5@124.1,105.41 ; U9.5@124.1,105.41 124.85,103.96 U9.5@124.85,103.81 ; U9.5@124.1,105.41 124.85,106.86 U9.5@124.85,107.01 ; 126.429,63.979 126.43,63.972 126.43,63.957 ; D3.2@134.19,40.485 ccw(c134.677,41.132) 134.79,40.33 ; D3.2@134.19,40.485 ccw(c134.677,41.132) 134.79,40.33 ; D3.2@134.19,40.485 ccw(c134.677,41.132) 134.791,40.33 ; D3.2@134.19,40.485 ccw(c134.677,41.132) 134.791,40.33 ; 134.482,97.79 134.545,97.781 134.576,97.772 ; 134.666,44.122 134.694,44.13 ; 134.694,44.13 ccw(c134.582,44.557) 134.992,44.392 cw(c134.582,44.557) 134.694,44.13 ; 134.694,44.13 cw(c134.805,43.702) 135.082,44.046 ccw(c134.805,43.703) 134.694,44.13 ; J1.DP4@52.017,94.104 ccw(c50.689,95.596) 52.682,95.48 cw(c50.689,95.596) J1.DP4@52.017,94.104 ; v1@52.422,95.475 cw(c51.672,95.098) 52.469,94.835 ccw(c51.672,95.098) v1@52.422,95.475 ; 52.52,94.989 cw(c53.098,94.797) 52.825,95.342 ccw(c53.098,94.797) 52.52,94.989 ; v1@52.615,37.313 ccw(c52.303,37.534) 52.68,37.598 cw(c52.303,37.534) v1@52.615,37.313 ; J1.DP4@52.642,94.789 ccw(c53.059,94.765) 52.747,94.487 cw(c53.059,94.765) J1.DP4@52.642,94.789 ; 52.657,46.091 ccw(c53.399,45.978) 52.794,45.534 cw(c53.399,45.978) 52.657,46.091 ; 52.665,37.686 cw(c53.472,37.825) 52.803,38.298 ccw(c53.472,37.825) 52.665,37.686 ; J2.DP5@55.107,44.837 ccw(c55.595,45.54) 55.747,44.697 cw(c55.595,45.54) J2.DP5@55.107,44.837 ; J1.DP5@55.109,93.73 ccw(c55.594,94.424) 55.741,93.591 cw(c55.594,94.424) J1.DP5@55.109,93.73 ; J2.DP0@55.112,38.982 cw(c55.599,38.307) 55.732,39.129 ccw(c55.599,38.307) J2.DP0@55.112,38.982 ; J1.DP0@55.13,87.891 cw(c55.575,87.323) 55.662,88.039 ccw(c55.575,87.323) J1.DP0@55.13,87.891 ; 55.717,93.586 cw(c55.782,93.216) 55.998,93.524 ccw(c55.782,93.216) 55.717,93.586 ; 55.725,44.693 cw(c55.79,44.332) 55.999,44.634 ccw(c55.79,44.332) 55.725,44.693 ; 56.506,66.485 ccw(c56.891,66.421) 56.574,66.195 cw(c56.891,66.421) 56.506,66.485 ; 56.507,66.487 cw(c57.093,66.389) 56.747,66.873 ccw(c57.093,66.389) 56.507,66.487 ; v1@87.612,80.341 cw(c87.321,80.143) 87.667,80.077 ccw(c87.321,80.143) v1@87.612,80.341 ; 107.937,91.236 ccw(c108.298,91.17) 107.996,90.961 cw(c108.298,91.17) 107.937,91.236 ; 111.815,69.883 cw(c111.88,69.522) 112.089,69.824 ccw(c111.88,69.522) 111.815,69.883 ; v1@112.701,93.954 cw(c112.91,93.652) 112.976,94.013 ccw(c112.91,93.652) v1@112.701,93.954 ; C33.1@115.883,77.022 ccw(c116.418,77.796) 116.587,76.87 cw(c116.418,77.796) C33.1@115.883,77.022 ; C33.1@115.922,76.992 ccw(c116.37,77.528) 116.433,76.833 cw(c116.37,77.528) C33.1@115.922,76.992 ; v1@119.354,71.449 cw(c119.052,71.24) 119.413,71.174 ccw(c119.052,71.24) v1@119.354,71.449 ; v1@122.025,106.583 cw(c121.95,103.772) 123.991,105.707 ccw(c121.95,103.772) v1@122.025,106.583 ; v1@122.31,106.316 cw(c122.595,105.789) 122.766,106.363 ccw(c122.595,105.789) v1@122.31,106.316 ; v1@122.431,106.722 ccw(c123.177,107.127) 122.936,106.313 cw(c123.177,107.127) v1@122.431,106.722 ; 122.749,106.564 cw(c122.693,104.476) 124.209,105.913 ccw(c122.693,104.476) 122.749,106.564 ; v1@133.361,35.006 ccw(c133.067,35.571) 133.674,35.379 cw(c133.067,35.571) v1@133.361,35.006 ; D1.2@133.388,35.789 cw(c132.992,35.426) 133.529,35.403 ccw(c132.992,35.426) D1.2@133.388,35.789 ; v1@133.504,34.839 cw(c135.138,34.769) 134.033,35.974 ccw(c135.138,34.769) v1@133.504,34.839 ; D1.2@133.712,35.498 ccw(c134.486,35.254) 133.766,34.879 cw(c134.486,35.254) D1.2@133.712,35.498 ; D2.2@134.196,44.29 ccw(c134.669,44.905) 134.769,44.136 cw(c134.669,44.905) D2.2@134.196,44.29 ; D3.2@134.223,40.459 ccw(c134.625,40.922) 134.669,40.31 cw(c134.625,40.922) D3.2@134.223,40.459
  Top Layer w1: v1(78.806,93.756) v1(82.863,96.312) v1(90.366,101.092) 97.52,105.579 97.56,105.604 97.64,105.66 97.678,105.691 D5.16@99.21,106.934
  Top Layer w1.2: CLOCKTAMER.16@59.34,116.205 CLOCKTAMER.14@61.88,116.205 CLOCKTAMER.12@64.42,116.205 CLOCKTAMER.10@66.96,116.205 CLOCKTAMER.8@69.5,116.205 CLOCKTAMER.6@72.04,116.205 CLOCKTAMER.4@74.58,116.205 CLOCKTAMER.2@77.12,116.205
  other v2: 112.97,62.23 114.27,62.23 115.57,62.23 112.97,63.53 114.27,63.53 115.57,63.53 112.97,64.83 114.27,64.83 115.57,64.83
HWB: P6.1 R2.2 U3.43 | length 44.6
  Top Layer w0.3: P6.1@55.88,113.865 56.48,113.565 56.63,113.565 56.711,113.565 56.861,113.509 56.922,113.457 58.817,111.841 58.875,111.792 58.94,111.652 ; P6.1@56.269,113.408 cw(c56.65,112.959) 56.854,113.512 cw(c57.062,114.076) P6.1@56.471,113.97 ; P6.1@56.304,113.44 cw(c56.606,113.138) P6.1@56.606,113.565 ; P6.1@56.333,113.472 cw(c56.588,113.252) 56.704,113.567 cw(c56.823,113.889) P6.1@56.48,113.88 ; R2.2@58.812,111.379 ccw(c58.584,111.652) 58.94,111.652 ; R2.2@58.851,111.404 ccw(c58.768,111.574) 58.939,111.653 ; R2.2@58.94,111.125 58.94,111.425 58.94,111.575 58.94,111.652 ; R2.2@59.068,111.379 cw(c59.296,111.652) 58.94,111.652 ; v1@73.988,90.328 cw(c73.476,89.816) 74.2,89.816 cw(c74.924,89.816) v1@74.412,90.328 ; U3.43@74.112,89.618 ccw(c73.898,89.832) 74.2,89.832 ccw(c74.502,89.832) U3.43@74.288,89.618 ; U3.43@74.2,88.93 74.2,89.655 74.2,89.805 v1(74.2,90.54)
  Bottom Layer w0.3: P6.1@55.771,113.275 cw(c55.661,112.68) 56.238,112.865 cw(c56.886,113.072) P6.1@56.351,113.494 ; P6.1@55.848,113.266 cw(c55.827,112.88) 56.195,112.998 cw(c56.609,113.131) P6.1@56.303,113.439 ; P6.1@55.88,113.865 56.18,113.265 56.18,113.115 56.18,113.045 56.223,112.911 56.264,112.854 56.857,112.022 56.881,111.989 56.923,111.919 56.943,111.882 57.449,110.917 57.456,110.903 59.906,105.935 59.921,105.905 59.958,105.852 59.98,105.827 v1(74.2,90.54) ; P6.1@56.18,113.141 cw(c56.604,113.141) P6.1@56.304,113.441 ; v1@73.9,90.551 ccw(c73.176,90.577) 73.707,91.07 ccw(c74.237,91.564) v1@74.211,90.84
LED0: R4.2 U3.14 | length 34.2
  Top Layer w0.3: U3.14@80.514,72.94 cw(c80.321,72.738) 80.6,72.738 ; U3.14@80.6,73.63 80.6,72.905 80.6,72.755 80.6,72.738 ; 80.623,72.63 cw(c80.97,72.719) U3.14@80.696,72.95 ; U3.14@80.686,72.94 ccw(c80.879,72.738) 80.6,72.738 ; R4.2@102.605,50.033 ccw(c102.314,49.779) 102.314,50.165 ; R4.2@102.605,50.297 cw(c102.314,50.551) 102.314,50.165 ; R4.2@102.755,50.165 102.555,50.165 102.405,50.165 102.314,50.165 ; 80.6,72.738 80.604,72.703 80.609,72.687 80.658,72.495 80.692,72.361 80.827,72.121 80.923,72.022 102.083,50.301 102.146,50.236 102.314,50.165
LED1: R6.2 U3.15 | length 32.1
  Top Layer w0.3: U3.15@81.312,72.942 cw(c81.098,72.728) 81.4,72.728 cw(c81.702,72.728) U3.15@81.488,72.942 ; 81.394,72.714 cw(c81.548,72.778) U3.15@81.463,72.922 ; U3.15@81.4,73.63 81.4,72.905 81.4,72.755 81.4,72.7 81.442,72.598 81.482,72.559 102.089,52.2 102.152,52.137 102.316,52.07 ; R6.2@102.604,51.939 ccw(c102.316,51.689) 102.316,52.07 ; R6.2@102.604,52.201 cw(c102.316,52.451) 102.316,52.07 ; R6.2@102.755,52.07 102.555,52.07 102.405,52.07 102.316,52.07
LED2: R5.2 U3.16 | length 29.7
  Top Layer w0.3: U3.16@82.2,73.63 82.325,73.205 82.475,73.205 82.563,73.205 ; U3.16@82.323,73.006 cw(c82.563,72.96) 82.563,73.205 ; R5.2@102.604,53.844 ccw(c102.317,53.595) 102.317,53.975 ; R5.2@102.604,54.106 cw(c102.317,54.355) 102.317,53.975 ; R5.2@102.755,53.975 102.555,53.975 102.405,53.975 102.317,53.975 ; 82.563,73.205 82.728,73.138 82.79,73.076 102.09,54.104 102.152,54.042 102.317,53.975
LED3: R7.2 U3.17 | length 28
  Top Layer w0.3: U3.17@83.85,75.28 84.275,75.155 84.275,75.005 84.275,74.918 84.339,74.758 84.398,74.696 102.078,56.021 102.142,55.953 102.312,55.88 ; R7.2@102.605,55.748 ccw(c102.312,55.49) 102.312,55.88 ; R7.2@102.605,56.012 cw(c102.312,56.27) 102.312,55.88 ; R7.2@102.755,55.88 102.555,55.88 102.405,55.88 102.312,55.88
LMKCLK: U1.4 U3.61 | length 51.5
  Top Layer w0.25: v1(103.824,65.802) 109.533,64.834 109.546,64.832 109.571,64.828 109.584,64.827 110.062,64.786 110.074,64.785 110.099,64.784 110.111,64.784 110.563,64.78 110.57,64.78 110.695,64.78 U1.4@110.87,64.78 ; v1@104.013,65.537 cw(c104.467,64.898) 104.598,65.671 cw(c104.729,66.445) v1@104.089,65.991
  Top Layer w0.3: U3.61@68.55,77.68 69.275,77.68 69.425,77.68 69.432,77.68 ; U3.61@69.229,77.777 ccw(c69.483,78.091) 69.526,77.689 ; U3.61@69.243,77.596 cw(c69.432,77.424) 69.432,77.68 ; U3.61@69.243,77.764 ccw(c69.432,77.936) 69.432,77.68 ; v1@71.955,78.157 cw(c71.392,78.613) 71.468,77.892 cw(c71.543,77.172) v1@71.999,77.735 ; v1(72.188,77.968) 69.454,77.682 69.447,77.681 69.432,77.68
  Bottom Layer w0.3: v1@72.082,77.687 cw(c71.827,77.009) 72.487,77.308 cw(c73.147,77.607) v1@72.469,77.862 ; v1(72.188,77.968) 72.602,77.055 72.642,76.966 72.71,76.777 72.735,76.682 73.208,74.931 73.231,74.847 73.319,74.699 73.381,74.639 73.411,74.61 73.48,74.541 73.509,74.511 73.568,74.45 73.712,74.363 73.793,74.34 v1(103.824,65.802) ; v1@103.562,65.656 ccw(c102.93,65.304) 103.128,66.001 ccw(c103.326,66.697) v1@103.678,66.065
LMKDATA: U1.5 U3.60 | length 52.4
  Top Layer w0.25: v1(104.196,64.474) 109.83,64.235 109.88,64.234 110.116,64.234 110.153,64.234 110.225,64.238 110.261,64.243 110.555,64.279 110.558,64.28 110.566,64.28 110.57,64.28 110.695,64.28 U1.5@110.87,64.28 ; v1@104.416,64.235 cw(c104.947,63.657) 104.98,64.441 cw(c105.013,65.225) v1@104.436,64.694
  Top Layer w0.3: U3.60@68.55,78.48 69.275,78.48 69.425,78.48 69.437,78.48 ; U3.60@69.222,78.582 ccw(c69.496,78.968) 69.575,78.502 ; U3.60@69.242,78.395 cw(c69.436,78.214) 69.436,78.48 ; U3.60@69.242,78.565 ccw(c69.436,78.746) 69.436,78.48 ; v1@70.822,78.929 cw(c70.231,79.348) 70.353,78.634 cw(c70.474,77.92) v1@70.893,78.511 ; v1(71.067,78.756) 69.471,78.484 69.46,78.482 69.437,78.48
  Bottom Layer w0.3: v1@70.918,78.495 cw(c70.559,77.866) 71.257,78.057 cw(c71.956,78.247) v1@71.327,78.607 ; v1(71.067,78.756) 71.344,77.738 71.376,77.622 71.5,77.415 71.587,77.332 71.75,77.178 71.988,76.802 72.057,76.589 72.661,74.721 72.707,74.579 72.864,74.327 72.97,74.224 73.016,74.179 73.049,74.146 73.094,74.1 73.201,73.99 73.464,73.83 73.612,73.785 v1(104.196,64.474) ; v1@103.931,64.333 ccw(c103.292,63.992) 103.503,64.685 ccw(c103.714,65.378) v1@104.055,64.739
LMKGOE: U1.11 U3.58 | length 60.8
  Top Layer w0.25: U3.58@68.55,80.08 69.3,80.08 69.425,80.08 69.443,80.08 ; U3.58@69.224,80.21 ccw(c69.543,80.77) 69.714,80.149 ; U3.58@69.272,79.992 cw(c69.443,79.868) 69.443,80.08 ; U3.58@69.272,80.168 ccw(c69.443,80.292) 69.443,80.08 ; v1@72.291,80.394 ccw(c71.721,79.855) 71.743,80.639 ccw(c71.765,81.423) v1@72.304,80.853 ; v1(72.527,80.617) 71.65,80.642 71.586,80.643 71.457,80.628 71.394,80.611 69.498,80.09 69.48,80.085 69.443,80.08 ; v1(105.531,60.934) 110.544,61.279 110.57,61.28 110.695,61.28 U1.11@110.87,61.28 ; v1@105.745,61.179 ccw(c106.26,61.771) 106.314,60.988 ccw(c106.368,60.205) v1@105.776,60.721
  Bottom Layer w0.3: v1@72.303,80.417 ccw(c71.763,79.935) 71.804,80.658 ccw(c71.845,81.381) v1@72.327,80.841 ; v1(72.527,80.617) 71.677,80.665 71.546,80.673 71.292,80.613 71.179,80.548 70.322,80.058 70.146,79.957 69.858,79.667 69.66,79.313 69.562,78.917 69.573,78.511 69.692,78.121 69.801,77.95 70.481,76.882 70.548,76.777 70.707,76.584 70.799,76.497 70.857,76.442 70.942,76.305 70.966,76.229 71.481,74.576 71.49,74.546 71.551,74.358 71.639,74.088 71.937,73.603 72.138,73.404 72.205,73.338 72.208,73.335 72.274,73.268 72.472,73.069 72.945,72.776 73.211,72.687 73.629,72.548 73.645,72.542 73.97,72.436 73.972,72.435 98.79,64.363 98.814,64.355 98.861,64.335 98.884,64.324 v1(105.531,60.934) ; v1@105.246,60.841 ccw(c104.557,60.618) 104.886,61.263 ccw(c105.215,61.908) v1@105.439,61.219
LMKLE: U1.6 U3.59 | length 56.5
  Top Layer w0.25: U3.59@68.55,79.28 69.3,79.28 69.425,79.28 69.441,79.28 ; U3.59@69.229,79.407 ccw(c69.546,79.916) 69.681,79.332 ; U3.59@69.272,79.193 cw(c69.441,79.073) 69.441,79.28 ; U3.59@69.272,79.367 ccw(c69.441,79.487) 69.441,79.28 ; v1@71.349,79.937 cw(c70.741,80.311) 70.887,79.612 ; v1@71.441,79.5 ccw(c71.034,78.913) 70.887,79.612 ; v1(71.626,79.767) 70.887,79.612 ; v1(104.705,62.956) 105.837,63.165 105.873,63.171 110.093,63.697 110.123,63.7 110.182,63.71 110.214,63.716 110.441,63.761 110.487,63.771 110.507,63.775 110.549,63.78 110.57,63.78 110.695,63.78 U1.6@110.87,63.78 ; v1@104.889,63.223 ccw(c105.333,63.87) 105.476,63.098 ccw(c105.619,62.327) v1@104.973,62.771 ; 69.441,79.28 69.472,79.284 69.487,79.287 70.869,79.608 70.887,79.612
  Bottom Layer w0.3: 71.193,76.915 71.123,76.981 71,77.133 70.95,77.215 70.298,78.288 70.182,78.478 70.155,78.924 70.339,79.33 70.693,79.604 70.912,79.642 v1(71.626,79.767) ; 71.193,76.915 71.304,76.81 71.466,76.551 71.512,76.407 72.103,74.55 72.169,74.342 72.398,73.968 72.555,73.813 72.613,73.756 72.626,73.743 72.683,73.685 72.836,73.53 73.204,73.303 73.41,73.236 98.975,64.934 98.996,64.926 v1(104.705,62.956) ; v1@71.381,79.939 cw(c70.788,80.356) 70.913,79.642 cw(c71.037,78.929) v1@71.454,79.521 ; v1@104.435,62.824 ccw(c103.784,62.507) 104.02,63.192 ccw(c104.257,63.876) v1@104.574,63.225
LMKSYNC: U1.27 U3.42 | length 100.5
  Top Layer w0.25: v1(86.658,89.487) 99.676,85.713 99.89,85.652 100.297,85.46 100.669,85.206 100.995,84.897 101.133,84.717 101.715,83.957 101.698,62.412 105.181,57.719 109.342,55.832 120.953,55.832 123.56,60.322 123.663,60.501 123.689,60.914 123.527,61.295 123.213,61.562 123.012,61.611 122.151,61.823 122.126,61.829 122.075,61.835 122.05,61.835 119.85,61.835 119.837,61.835 118.026,61.781 117.97,61.78 117.845,61.78 U1.27@117.67,61.78 ; v1@86.815,89.202 cw(c87.193,88.514) 87.412,89.268 cw(c87.63,90.022) v1@86.943,89.643
  Top Layer w0.3: U3.42@74.914,89.62 ccw(c74.721,89.822) 75,89.822 ; U3.42@75,88.93 75,89.655 75,89.805 75,89.822 ; 75.023,89.93 ccw(c75.37,89.841) U3.42@75.096,89.61 ; U3.42@75.086,89.62 cw(c75.279,89.822) 75,89.822 ; v1@87.361,96.943 cw(c86.677,97.181) 86.992,96.529 cw(c87.307,95.877) v1@87.545,96.561 ; v1(87.644,96.844) 76.157,91.291 76.008,91.219 75.746,91.02 75.637,90.896 75.287,90.499 75.205,90.406 75.089,90.186 75.058,90.065 75.009,89.873 75.004,89.856 75,89.822
  Bottom Layer w0.3: v1@86.476,89.725 ccw(c86.037,90.301) 86.754,90.204 ccw(c87.472,90.108) v1@86.897,89.669 ; v1(86.658,89.487) v1(87.644,96.844) ; v1@87.406,96.662 cw(c86.83,96.222) 87.548,96.126 cw(c88.266,96.03) v1@87.826,96.605